# Altium PCB bt-bezel-braille4-kailh.PcbDoc
Units mm, origin at the board's own origin, x right, y up, seen from the top; angles counter-clockwise.
Board outline 65.7 x 134.7 mm, 2 copper layers (Top Layer, Bottom Layer), stack 1.571 mm thick; 39 components, 22 nets, 313 pads, 28 vias.
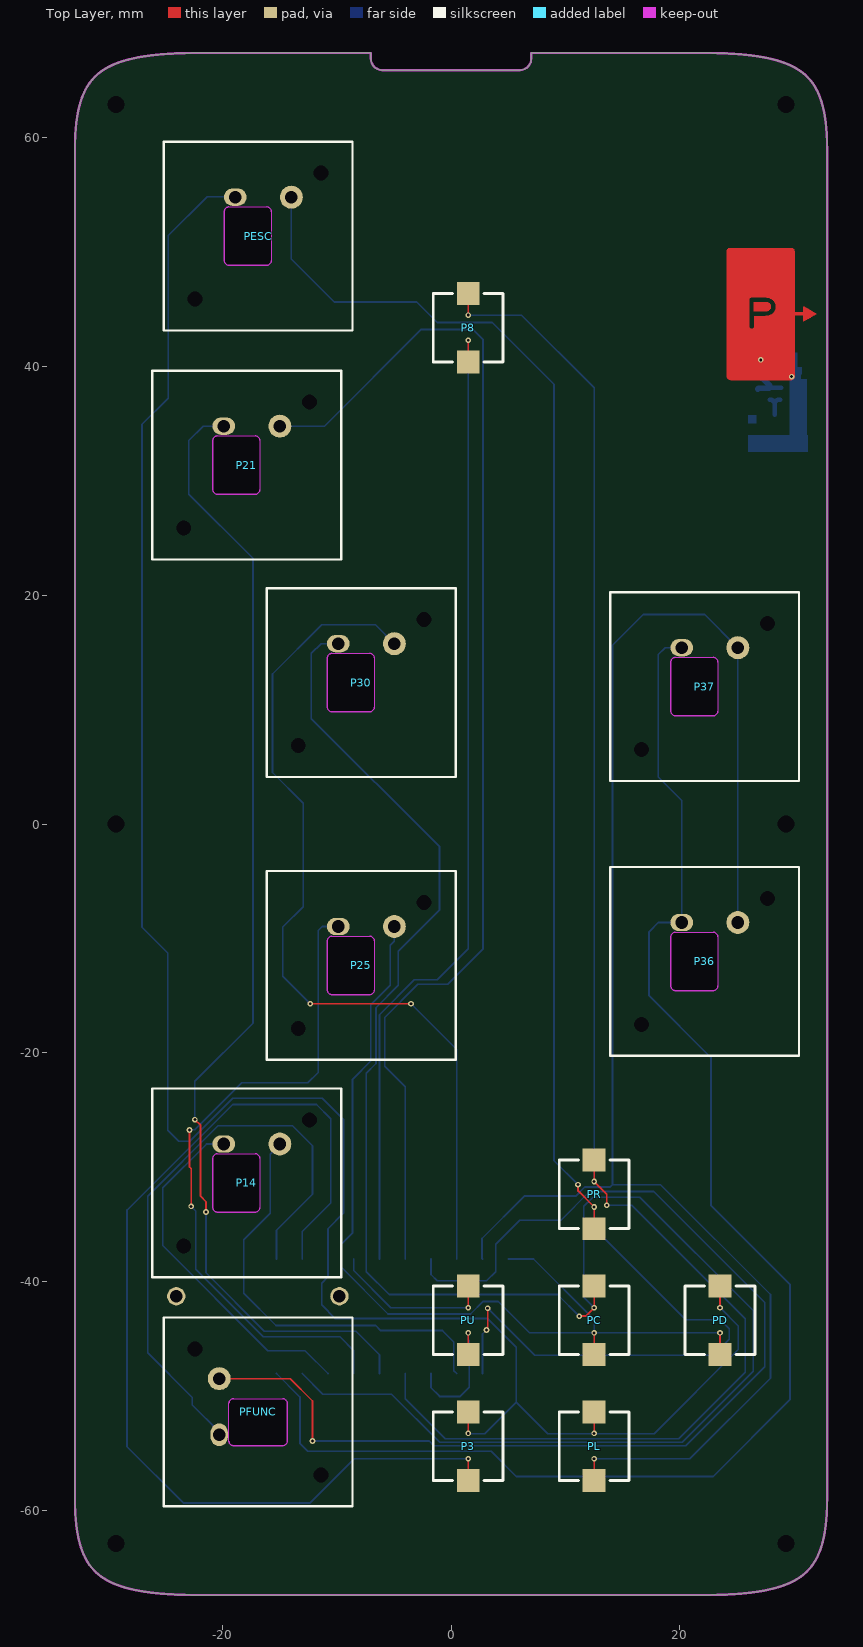
[diagram p0: Top Layer view]
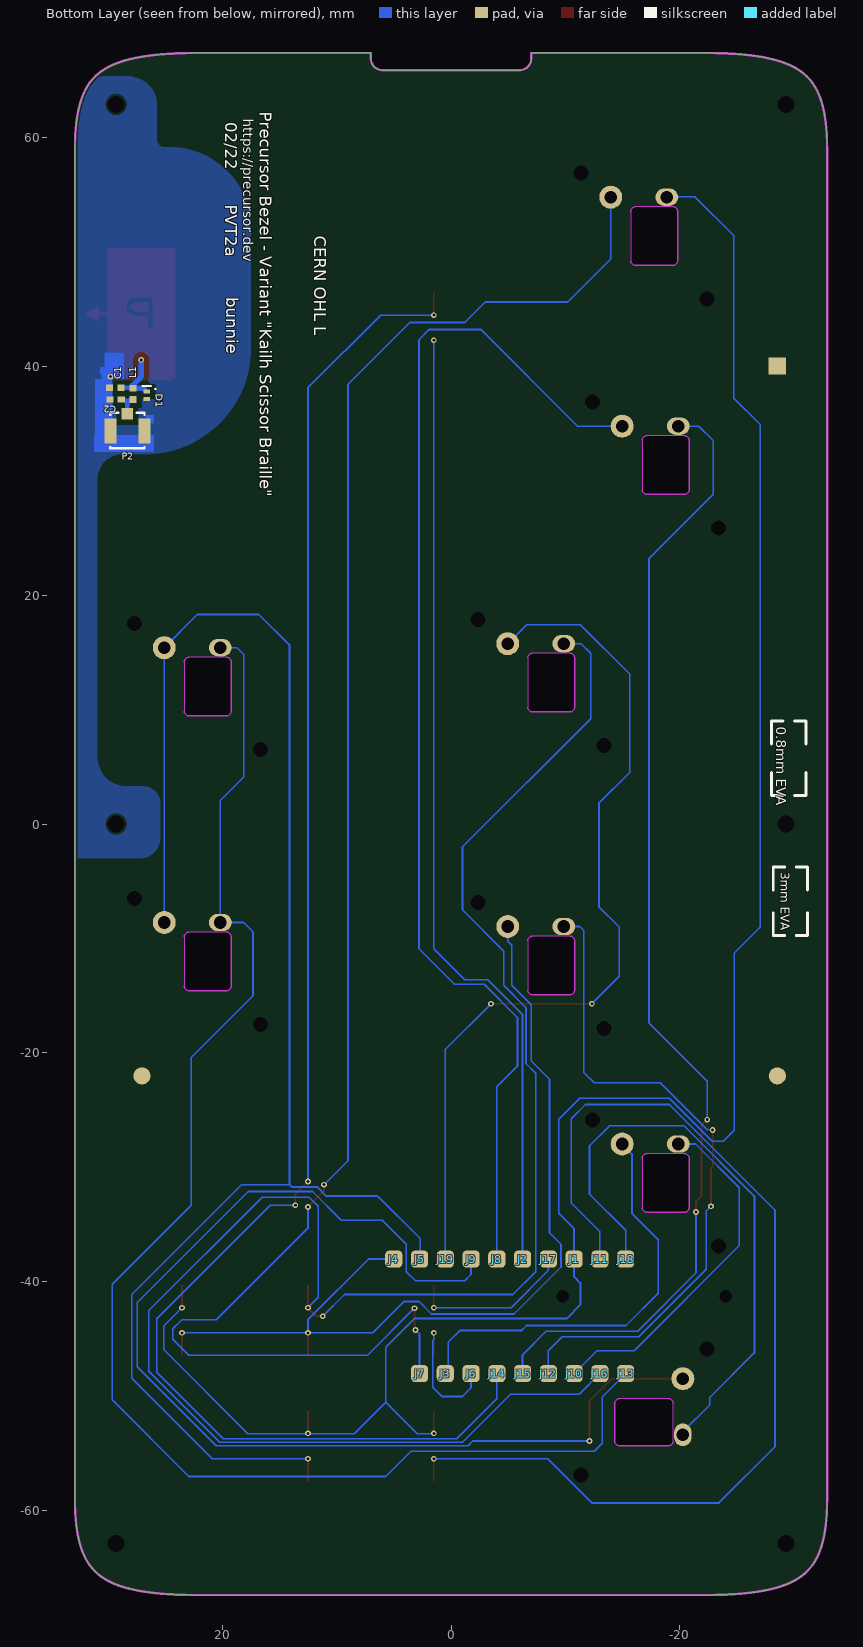
[diagram p1: Bottom Layer view, seen from below]
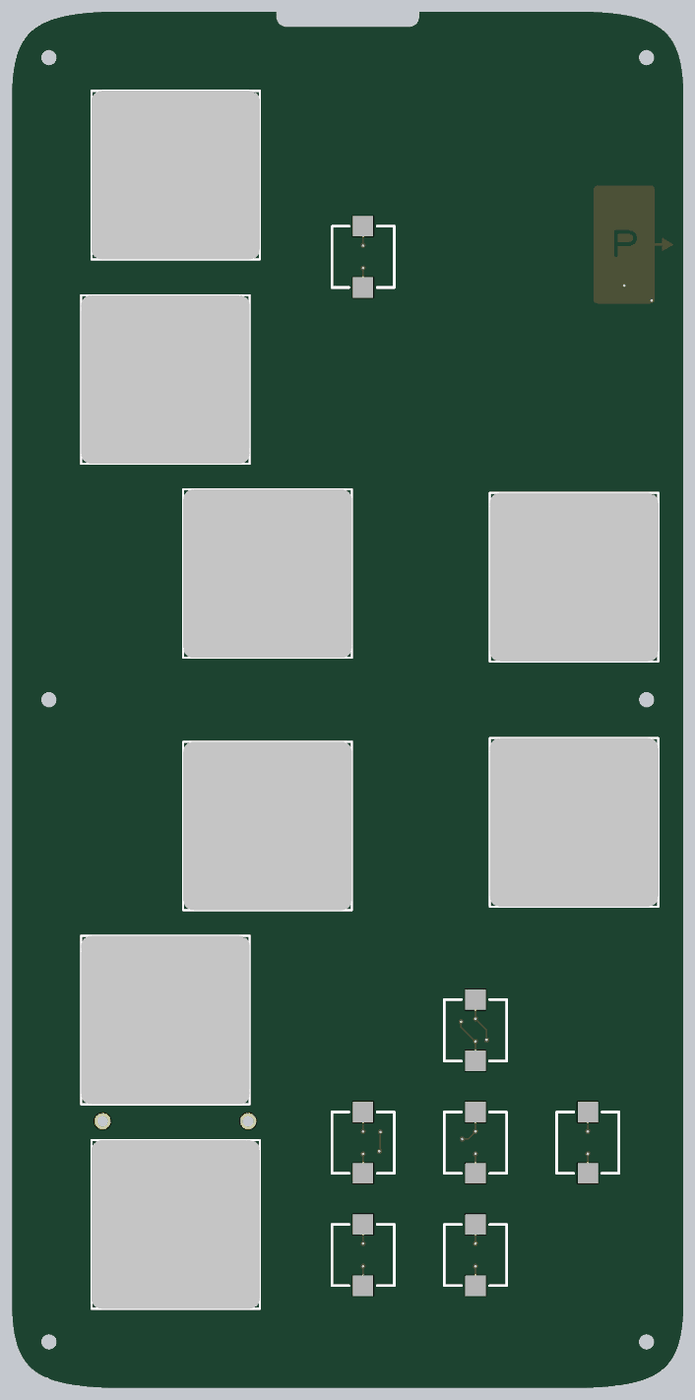
[diagram p2: 3D render of the assembled board from above, using the file's embedded part models]

## Layer stack, top to bottom
Top Layer: signal copper 0.0356
Light blocking FR-4: dielectric 1.5, FR-4, Dk 4.8
Bottom Layer: signal copper 0.0356
Bottom Solder: solder mask 0.0102, Solder Resist, Dk 3.5

## Board outline
1486 vertices, not listed, extent -32.85,-67.35 32.85,67.35
cut-out: 19.2,14.15 cw(c19.6,14.15) 19.6,14.55 22.9,14.55 cw(c22.9,14.15) 23.3,14.15 23.3,9.85 cw(c22.9,9.85) 22.9,9.45 19.6,9.45 cw(c19.6,9.85) 19.2,9.85
cut-out: 19.2,-9.85 cw(c19.6,-9.85) 19.6,-9.45 22.9,-9.45 cw(c22.9,-9.85) 23.3,-9.85 23.3,-14.15 cw(c22.9,-14.15) 22.9,-14.55 19.6,-14.55 cw(c19.6,-14.15) 19.2,-14.15
cut-out: -19.4,-50.6 cw(c-19,-50.6) -19,-50.2 -14.7,-50.2 cw(c-14.7,-50.6) -14.3,-50.6 -14.3,-53.9 cw(c-14.7,-53.9) -14.7,-54.3 -19,-54.3 cw(c-19,-53.9) -19.4,-53.9
cut-out: -20.8,-29.2 cw(c-20.4,-29.2) -20.4,-28.8 -17.1,-28.8 cw(c-17.1,-29.2) -16.7,-29.2 -16.7,-33.5 cw(c-17.1,-33.5) -17.1,-33.9 -20.4,-33.9 cw(c-20.4,-33.5) -20.8,-33.5 -20.8,-29.2
cut-out: -10.8,-10.2 cw(c-10.4,-10.2) -10.4,-9.8 -7.1,-9.8 cw(c-7.1,-10.2) -6.7,-10.2 -6.7,-14.5 cw(c-7.1,-14.5) -7.1,-14.9 -10.4,-14.9 cw(c-10.4,-14.5) -10.8,-14.5 -10.8,-10.2
cut-out: -10.8,14.5 cw(c-10.4,14.5) -10.4,14.9 -7.1,14.9 cw(c-7.1,14.5) -6.7,14.5 -6.7,10.2 cw(c-7.1,10.2) -7.1,9.8 -10.4,9.8 cw(c-10.4,10.2) -10.8,10.2 -10.8,14.5
cut-out: -19.8,53.5 cw(c-19.4,53.5) -19.4,53.9 -16.1,53.9 cw(c-16.1,53.5) -15.7,53.5 -15.7,49.2 cw(c-16.1,49.2) -16.1,48.8 -19.4,48.8 cw(c-19.4,49.2) -19.8,49.2 -19.8,53.5
cut-out: -20.8,33.5 cw(c-20.4,33.5) -20.4,33.9 -17.1,33.9 cw(c-17.1,33.5) -16.7,33.5 -16.7,29.2 cw(c-17.1,29.2) -17.1,28.8 -20.4,28.8 cw(c-20.4,29.2) -20.8,29.2 -20.8,33.5

## Design rules (kind name [scope] priority, off if disabled: settings)
Clearance Clearance_1 [InNetClass('RF') vs InNet('GND')] p1: gap=0.45 ignorepadtopadclearanceinfootprint=FALSE except(0: Arc-Hole Track-Hole SMDPad-Hole THPad-Hole Via-Hole Fill-Hole Poly-Hole Region-Hole Text-Hole)
Clearance [All] p2: gap=0.15 ignorepadtopadclearanceinfootprint=FALSE except(0: Arc-Hole Track-Hole SMDPad-Hole THPad-Hole Via-Hole Fill-Hole Poly-Hole Region-Hole Text-Hole)
ComponentClearance [All] p1 off: gap=0.254 collisioncheckmode=3 verticalgap=0.254 showdistances=FALSE
DiffPairsRouting [All] p1: maxlimit=0.254 minlimit=0.254 mostfreqgap=0.254 toplayer_minwidth=0.381 toplayer_maxwidth=0.381 toplayer_prefwidth=0.381 bottomlayer_minwidth=0.381 bottomlayer_maxwidth=0.381 bottomlayer_prefwidth=0.381 substack1={AFAED34E-20D2-479B-AD29-5B40F5E3A132} toplayer_{afaed34e-20d2-479b-ad29-5b40f5e3a132}_minwidth=0.381 toplayer_{afaed34e-20d2-479b-ad29-5b40f5e3a132}_maxwidth=0.381 toplayer_{afaed34e-20d2-479b-ad29-5b40f5e3a132}_prefwidth=0.381 bottomlayer_{afaed34e-20d2-479b-ad29-5b40f5e3a132}_minwidth=0.381 bottomlayer_{afaed34e-20d2-479b-ad29-5b40f5e3a132}_maxwidth=0.381 bottomlayer_{afaed34e-20d2-479b-ad29-5b40f5e3a132}_prefwidth=0.381 maxuncoupledlength=12.7
Height [All] p1 off: minheight=0 maxheight=25.4 prefheight=12.7
PolygonConnect [All] p1: connectstyle=Direct reliefconductorwidth=0.254 reliefentries=4 polygonreliefangle="90 Angle" airgapwidth=0.254
RoomDefinition kbd [InComponentClass('kbd')] p1 off: confinementstyle=ConfineIn formatcopy=TRUE lockcomponents=FALSE outline 34.001,-65.945 33.5,-65.945 33.5,-39.945 34.001,-39.945
RoutingVias [All] p1: holewidth=0.25 width=0.5 viastyle="Through Hole" minholewidth=0.25 minwidth=0.5 maxholewidth=0.5 maxwidth=1
SolderMaskExpansion [All] p1: expansion=0.102 istentingtop=FALSE
Width [All] p1: maxlimit=5 minlimit=0.15 preferedwidth=0.15 substack1={AFAED34E-20D2-479B-AD29-5B40F5E3A132} minimp=50.000000 maximp=50.000000 favimp=50.000000
27 further rules are at their usual default settings.

## Classes and differential pairs
net class RF: ANT1 FEED1

## Components (designator, comment, footprint, x,y, rotation, side; value= is the part's Value field where it differs from the comment)
C1 "3.9pF, NP0" B_CAP0402 29.335,38.111 r0 bottom
C2 "3.3pF, NP0" B_CAP0402 29.3,37.075 r0 bottom
D1 "TPD1E01B04DPYT" TI_PX1SON-N2 26.575,37.45 r270 bottom
J1 "solder pad (DNP)" TP_1.5x1.5_SMT -10.75,-38 r180 bottom
J2 "solder pad (DNP)" TP_1.5x1.5_SMT -6.25,-38 r180 bottom
J3 "solder pad (DNP)" TP_1.5x1.5_SMT 0.5,-48 r180 bottom
J4 "solder pad (DNP)" TP_1.5x1.5_SMT 5,-38 r180 bottom
J5 "solder pad (DNP)" TP_1.5x1.5_SMT 2.75,-38 r180 bottom
J6 "solder pad (DNP)" TP_1.5x1.5_SMT -1.75,-48 r180 bottom
J7 "solder pad (DNP)" TP_1.5x1.5_SMT 2.75,-48 r180 bottom
J8 "solder pad (DNP)" TP_1.5x1.5_SMT -4,-38 r180 bottom
J9 "solder pad (DNP)" TP_1.5x1.5_SMT -1.75,-38 r180 bottom
J10 "solder pad (DNP)" TP_1.5x1.5_SMT -10.75,-48 r90 bottom
J11 "solder pad (DNP)" TP_1.5x1.5_SMT -13,-38 r180 bottom
J12 "solder pad (DNP)" TP_1.5x1.5_SMT -8.5,-48 r90 bottom
J13 "solder pad (DNP)" TP_1.5x1.5_SMT -15.25,-48 r90 bottom
J14 "solder pad (DNP)" TP_1.5x1.5_SMT -4,-48 r90 bottom
J15 "solder pad (DNP)" TP_1.5x1.5_SMT -6.25,-48 r90 bottom
J16 "solder pad (DNP)" TP_1.5x1.5_SMT -13,-48 r90 bottom
J17 "solder pad (DNP)" TP_1.5x1.5_SMT -8.5,-38 r90 bottom
J18 "solder pad (DNP)" TP_1.5x1.5_SMT -15.25,-38 r90 bottom
J19 "solder pad (DNP)" TP_1.5x1.5_SMT 0.5,-38 r90 bottom
L1 "1.0nH" B_IND0402 27.775,37.575 r270 bottom
P2 "U.FL-R-SMT-1(10)" HRS_U.FL 28.266,34.316 r0 bottom
P3 "6mm square tact" PANASONIC_EVPAS 1.501,-54.35 r90 top
P8 "6mm square tact" PANASONIC_EVPAS 1.501,43.35 r90 top
P14 "Kailh Scissor" KAILH_CPG142501D03 -17.85,-31.35 r0 top
P21 "Kailh Scissor" KAILH_CPG142501D03 -17.85,31.35 r0 top
P25 "Kailh Scissor" KAILH_CPG142501D03 -7.85,-12.35 r0 top
P30 "Kailh Scissor" KAILH_CPG142501D03 -7.85,12.35 r0 top
P36 "Kailh Scissor" KAILH_CPG142501D03 22.152,-12 r0 top
P37 "Kailh Scissor" KAILH_CPG142501D03 22.152,12 r0 top
PC "6mm square tact" PANASONIC_EVPAS 12.501,-43.35 r90 top
PD "6mm square tact" PANASONIC_EVPAS 23.501,-43.35 r90 top
PESC "Kailh Scissor" KAILH_CPG142501D03 -16.847,51.35 r0 top
PFUNC "Kailh Scissor" KAILH_CPG142501D03 -16.847,-51.35 r90 top
PL "6mm square tact" PANASONIC_EVPAS 12.501,-54.35 r90 top
PR "6mm square tact" PANASONIC_EVPAS 12.501,-32.35 r90 top
PU "6mm square tact" PANASONIC_EVPAS 1.501,-43.35 r90 top

## Footprints (in the part's own frame and the unit in brackets; to place one, negate y for a bottom-side part, rotate by r counter-clockwise, add the part's x,y. Pads: shape width x height; smd on the part's side, far side on the other; paste and mask are expansions set on the pad)
B_CAP0402 [mm] "Capacitor 0402"
  rect 0.63x0.55 smd mask+0.07: 1(-0.5,0) 2(0.5,0)
  body extent -0.53,-0.27 0.53,0.28, height 0.4
B_IND0402 [mm] "Inductor 0402"
  rect 0.58x0.64 smd: 1(-0.49,0) 2(0.49,0)
  body extent -0.55,-0.3 0.55,0.3, height 0.6
HRS_U.FL [mm] "6 GHz U.FL connector (ISM band antennas)"
  rect 1.05x2.2 smd: GND(-1.475,0) GND(1.475,0)
  rect 1x1 smd: SIG(0,-1.5)
  silkscreen extent -1.5,-1.6 1.5,1.5, body extent -1.5,-1.6 1.5,1.5, height 1.24
KAILH_CPG142501D03 [mm] "Low profile scissor keyboard switch"
  round 1 hole 1.3 unplated: 0(-5.5,-5.5) 0(5.5,5.5)
  round 2 hole 1.1: 1(2.9,3.4)
  oval 2x1.5 hole 1.1: 2(-2,3.4)
  Keep-Out Layer lines w0.1: -2.95,-2.15 ccw(c-2.55,-2.15) -2.55,-2.55 0.75,-2.55 ccw(c0.75,-2.15) 1.15,-2.15 1.15,2.15 ccw(c0.75,2.15) 0.75,2.55 -2.55,2.55 ccw(c-2.55,2.15) -2.95,2.15 -2.95,-2.15
  silkscreen extent -8.25,-8.25 8.25,8.25, body extent -8.25,-8.25 8.25,8.25, height 5.27
PANASONIC_EVPAS [mm] "Tactile switch EVPAS series"
  rect 2x2 smd: 1(-3,0) 2(3,0)
  silkscreen extent -3,-3.05 3,3.05, body extent -3,-3.05 3,3.05, height 5
TI_PX1SON-N2 [mm] "TI 0402 SON diode footprint"
  rect 0.35x0.6 smd mask+0.05: 1(0.325,0) 2(-0.325,0)
  silkscreen extent -0.8,-0.34 -0.5,0.8, body extent -0.55,-0.35 0.55,0.35, height 0.45
TP_1.5x1.5_SMT [mm] "Test point 1.5x1.5mm SMT"
  rrect50% 1.5x1.5 smd mask+0.07: 1(0,0)

## Part data
C1: library part "Cap Semi", "Capacitor (Semiconductor SIM Model)", MPN=CL05C3R9CB5NNNC, MYPN=C-3p9-50-NP0-0402, VENDOR=Samsung
C2: library part "Cap Semi", "Capacitor (Semiconductor SIM Model)", MPN=GRM1555C1H3R3CA01D, MYPN=C-3p3-50-NP0-0402, VENDOR=Murata
D1: library part "D Zener", "CPDUR24V", LatestRevisionDate=17-Jul-2002, LatestRevisionNote="Re-released for DXP Platform.", MPN=TPD1E01B04DPYT, MYPN=D-TPD1E01B04DPYT, PackageDescription="Diode, Thru-Hole; 2 Leads; 0.7 in Pin Spacing", PackageReference=DIODE-0.7, Published=8-Jun-2000, Publisher="Altium Limited", VENDOR=TI
J1 J2 J3 J4 J5 J6 J7 J8 J9 J10 J11 J12 J13 J14 J15 J16 J17 J18 J19: library part CON1, "Connector", MPN=DNP, MYPN=J-TP-PWRTAP-0603, VENDOR=DNP
L1: library part Inductor, "Inductor", MPN=LQG15HS1N0S02D, Code_IEC=1005, Code_JEITA=0402, LatestRevisionDate=29-May-2009, LatestRevisionNote="IPC-7351 Footprint Added.", MYPN=L-1p0NH-0402, PackageDescription="Chip Inductor", PackageReference=0402-A, Published=8-Jun-2000, Publisher="Altium Limited", VENDOR=Murata
P2: library part BNC, "BNC Elbow Connector", MPN=P1163-0140R, LatestRevisionDate=17-Jul-2002, LatestRevisionNote="Re-released for DXP Platform.", MYPN=J-U.FL-SMT, Publisher="Altium Limited", VENDOR=Kaweei
P3 P8 PC PD PL PR PU: library part "Header 2", "Header, 2-Pin", MPN=EVP-ASAC1A, LatestRevisionDate=17-Jul-2002, LatestRevisionNote="Re-released for DXP Platform.", MYPN=SW-EVQ-P6DB35, Publisher="Altium Limited", VENDOR=Panasonic
P14 P21 P25 P30 P36 P37 PESC PFUNC: library part "Header 2", "Header, 2-Pin", MPN=CPG142501D03, LatestRevisionDate=17-Jul-2002, LatestRevisionNote="Re-released for DXP Platform.", MYPN=SW-EVQ-P6DB35, Publisher="Altium Limited", VENDOR=Kailh

## Free pads (board coordinates)
  round 1 hole 1.5 unplated mask+0.07: 0(-29.25,-62.85) 0(-29.25,0) 0(-29.25,62.85) 0(29.25,-62.85) 0(29.25,0) 0(29.25,62.85)
  rect 1.5x1.5 smd far side mask+1.5: 0(-28.5,40)
  round 1.6 / inner round 2 / far side round 0 hole 1.1: 0(-24,-41.25) 0(-9.75,-41.25)
  rect 0.051x0.864 on Bottom Overlay: 1(5.999,55.058) 1(7.066,57.141) 1(7.066,52.975) 1(11.994,52.975) 1(11.994,57.141)
  rect 0.051x0.965 on Bottom Overlay: 1(6.05,55.058) 1(6.101,55.058) 1(6.152,55.058) 1(7.117,52.975) 1(7.117,57.141)
  rect 0.051x1.016 on Bottom Overlay: 1(6.203,55.033) 1(11.943,53.001) 1(11.943,57.115)
  rect 0.051x1.067 on Bottom Overlay: 1(6.253,55.058) 1(6.304,55.058) 1(6.355,55.058) 1(6.406,55.058) 1(6.457,55.058)
  rect 0.051x1.118 on Bottom Overlay: 1(6.507,55.033) 1(7.168,53.001) 1(7.168,57.115) 1(11.892,53.001) 1(11.892,57.115)
  rect 0.051x1.168 on Bottom Overlay: 1(6.558,55.058) 1(6.609,55.058) 1(6.66,55.058) 1(6.711,55.058)
  rect 0.051x0.102 on Bottom Overlay: 1(6.761,52.899) 1(6.761,57.217) 1(11.994,56.15) 1(11.994,53.966)
  rect 0.051x1.219 on Bottom Overlay: 1(6.761,55.033) 1(7.219,57.115) 1(7.219,53.001)
  rect 0.051x0.254 on Bottom Overlay: 1(6.812,52.924) 1(6.812,57.192) 1(11.943,53.94) 1(11.943,56.176) 1(12.248,52.924) 1(12.248,57.192)
  rect 0.051x1.27 on Bottom Overlay: 1(6.812,55.058) 1(6.863,55.058) 1(6.914,55.058) 1(6.965,55.058)
  rect 0.051x0.356 on Bottom Overlay: 1(6.863,52.924) 1(6.863,57.192) 1(11.892,56.226) 1(11.892,53.89) 1(12.197,52.924)
  rect 0.051x0.457 on Bottom Overlay: 1(6.914,52.924)
  rect 0.051x0.508 on Bottom Overlay: 1(6.914,57.166) 1(12.146,52.95) 1(12.146,57.166)
  rect 0.051x0.61 on Bottom Overlay: 1(6.965,52.95) 1(6.965,57.166) 1(12.095,52.95)
  rect 0.051x1.473 on Bottom Overlay: 1(7.015,55.058)
  rect 0.051x0.762 on Bottom Overlay: 1(7.015,57.141) 1(12.045,52.975) 1(12.045,57.141)
  rect 0.051x0.711 on Bottom Overlay: 1(7.015,52.95)
  rect 0.051x1.727 on Bottom Overlay: 1(7.066,55.033) 1(10.876,56.506) 1(10.876,53.61) 1(10.927,53.61) 1(10.927,56.506) 1(10.978,56.506) 1(11.029,53.559) 1(11.029,56.557) 1(11.13,56.607) 1(11.13,53.509) 1(11.841,56.861)
  rect 0.051x1.981 on Bottom Overlay: 1(7.117,55.058) 1(8.641,56.531) 1(8.641,53.585) 1(10.419,53.534) 1(10.419,56.582)
  rect 0.051x2.184 on Bottom Overlay: 1(7.168,55.058)
  rect 0.051x2.489 on Bottom Overlay: 1(7.219,55.058) 1(9.505,52.772) 1(9.555,52.772) 1(9.606,52.772)
  rect 0.051x5.436 on Bottom Overlay: 1(7.269,55.058) 1(7.523,55.058)
  rect 0.051x5.537 on Bottom Overlay: 1(7.32,55.058) 1(7.422,55.058) 1(7.473,55.058)
  rect 0.051x5.639 on Bottom Overlay: 1(7.371,55.058)
  rect 0.051x5.334 on Bottom Overlay: 1(7.574,55.058) 1(7.625,55.058)
  rect 0.051x5.232 on Bottom Overlay: 1(7.676,55.058)
  rect 0.051x5.131 on Bottom Overlay: 1(7.727,55.058)
  rect 0.051x5.08 on Bottom Overlay: 1(7.777,55.033)
  rect 0.051x5.029 on Bottom Overlay: 1(7.828,55.058)
  rect 0.051x4.928 on Bottom Overlay: 1(7.879,55.058)
  rect 0.051x4.877 on Bottom Overlay: 1(7.93,55.033)
  rect 0.051x4.826 on Bottom Overlay: 1(7.981,55.058) 1(8.438,55.058) 1(8.489,55.058)
  rect 0.051x4.724 on Bottom Overlay: 1(8.031,55.058) 1(8.336,55.058) 1(8.387,55.058)
  rect 0.051x4.674 on Bottom Overlay: 1(8.082,55.033)
  rect 0.051x4.623 on Bottom Overlay: 1(8.133,55.058) 1(8.184,55.058) 1(8.235,55.058) 1(8.285,55.058)
  rect 0.051x2.337 on Bottom Overlay: 1(8.539,53.763) 1(10.063,53.001) 1(10.063,57.115)
  rect 0.051x2.286 on Bottom Overlay: 1(8.539,56.328) 1(8.997,57.039) 1(8.997,53.026)
  rect 0.051x2.134 on Bottom Overlay: 1(8.59,53.661) 1(8.59,56.455) 1(10.114,53.153) 1(10.114,56.963)
  rect 0.051x1.93 on Bottom Overlay: 1(8.692,56.607) 1(8.692,53.509) 1(10.317,56.658) 1(10.368,56.607) 1(10.368,53.509) 1(10.622,53.61) 1(10.622,56.506) 1(10.673,56.506) 1(10.673,53.61) 1(11.689,53.204) 1(11.689,56.912)
  rect 0.051x1.88 on Bottom Overlay: 1(8.743,53.483) 1(8.743,56.633) 1(8.793,53.432) 1(10.165,53.331) 1(10.165,56.785) 1(10.317,53.432) 1(10.724,53.585) 1(10.724,56.48) 1(11.435,53.331) 1(11.537,53.28) 1(11.537,56.836) 1(11.587,53.229) 1(11.587,56.836) 1(11.638,56.887) 1(11.638,53.229)
  rect 0.051x1.829 on Bottom Overlay: 1(8.793,56.658) 1(8.844,56.709) 1(8.844,53.407) 1(8.895,56.76) 1(8.895,53.356) 1(10.216,53.356) 1(10.216,56.709) 1(10.267,53.407) 1(10.267,56.709) 1(10.775,53.61) 1(10.775,56.506) 1(10.825,53.61) 1(10.825,56.506) 1(11.333,56.709) 1(11.384,53.356) 1(11.384,56.76) 1(11.435,56.76) 1(11.486,53.305) 1(11.486,56.811) 1(11.74,53.204) 1(11.74,56.912)
  rect 0.051x2.032 on Bottom Overlay: 1(8.946,53.204) 1(8.946,56.912) 1(10.47,53.559) 1(10.47,56.506) 1(10.521,56.506) 1(10.521,53.61) 1(10.571,53.61) 1(10.571,56.506)
  rect 0.051x2.54 on Bottom Overlay: 1(9.047,52.899) 1(9.047,57.217) 1(9.251,52.797) 1(9.251,57.319) 1(9.301,52.797) 1(9.301,57.319) 1(9.352,52.797) 1(9.352,57.319) 1(9.403,52.797) 1(9.403,57.319) 1(9.454,57.319) 1(9.454,52.797) 1(9.505,57.319) 1(9.555,57.319) 1(9.606,57.319) 1(9.657,57.319) 1(9.657,52.797) 1(9.708,52.797) 1(9.708,57.319) 1(9.759,52.797) 1(9.759,57.319) 1(9.809,52.797) 1(9.809,57.319) 1(9.86,52.797)
  rect 0.051x2.591 on Bottom Overlay: 1(9.098,52.823) 1(9.149,52.823) 1(9.149,57.293) 1(9.2,52.823) 1(9.2,57.293) 1(9.86,57.293) 1(9.911,52.823) 1(9.911,57.293) 1(9.962,52.823) 1(9.962,57.293) 1(10.013,52.874) 1(10.013,57.242)
  rect 0.051x2.642 on Bottom Overlay: 1(9.098,57.268)
  rect 0.051x1.676 on Bottom Overlay: 1(10.978,53.585) 1(11.841,53.229)
  rect 0.051x1.778 on Bottom Overlay: 1(11.079,53.534) 1(11.079,56.582) 1(11.181,53.483) 1(11.181,56.633) 1(11.232,56.684) 1(11.232,53.432) 1(11.283,56.684) 1(11.283,53.432) 1(11.333,53.382) 1(11.791,56.887) 1(11.791,53.229)
  rect 0.051x0.66 on Bottom Overlay: 1(12.095,57.141)
  rect 0.051x0.406 on Bottom Overlay: 1(12.197,57.166)
  rect 0.051x0.152 on Bottom Overlay: 1(12.299,52.924) 1(12.299,57.192)
  round 1.5 smd far side mask+1.5: 2(27,-22) 3(-28.5,-22)

## Via types
v1: diameter 0.5, hole 0.25, Top Layer to Bottom Layer, tented both sides, 28 vias

## Nets (pads, with @x,y where several pads share a name; then routed paths per layer and width w, separated by ;. In a path a pad name is that pad's centre, name@x,y a point inside that pad or via, vN(x,y) a via of type N, cw(c..) or ccw(c..) an arc to the next point about the centre after c; other vN are vias at no path point)
ANT1: C1.1 D1.2 L1.1 | length 4.6
  Bottom Layer w0.4: L1.1@27.833,38.292 27.85,38.275 L1.1@27.86,38.275 ; L1.1@27.86,38.075 27.85,38.075 cw(c27.886,38.075) 27.886,38.111 C1.1
  Bottom Layer w0.5: 26.8,38 26.865,38.065 L1.1 ; v1(27.057,40.539) 27.057,39.275 ccw(c27.557,39.275) 27.204,38.921 L1.1@27.833,38.292
  other v1: 29.75,39.075
FEED1: C2.1 L1.2 P2.SIG | length 2.3
  Bottom Layer w0.4: L1.2@27.85,37.075 cw(c27.85,36.659) 28.266,36.659 ; P2.SIG@28.266,35.759 P2.SIG 28.266,36.659 ; C2.1@28.76,37.075 28.682,37.075 ccw(c28.682,36.659) 28.266,36.659
GND: C1.2 C2.2 D1.1 P2.GND
KEY0: J10.1 P14.2 | length 31
  Bottom Layer w0.15: P14.2 -21.35,-27.95 -25.188,-31.788 -25.188,-36.812 -16,-46 -12.75,-46 J10.1
KEY1: J12.1 P25.2 | length 58.8
  Top Layer w0.15: v1(-22.85,-26.725) -22.85,-29.954 -22.7,-30.104 v1(-22.7,-33.4)
  Bottom Layer w0.15: v1(-22.85,-26.725) -22.825,-26.7 -22.375,-26.7 -18.275,-22.6 -12.5,-22.6 -11.6,-21.7 -11.6,-9.3 -11.25,-8.95 P25.2 ; v1(-22.7,-33.4) -22.3,-33.8 -22.3,-38.9 -16.4,-44.8 -9.7,-44.8 -8.5,-46 J12.1
KEY2: J13.1 P36.2 P37.2 | length 129.5
  Bottom Layer w0.15: J13.1 -13.2,-50.05 -13.2,-54.1 -12.5,-54.8 3.5,-54.8 5.7,-57 22.9,-57 29.6,-50.3 29.6,-40.2 22.7,-33.3 22.7,-20.4 17.3,-15 17.3,-9.4 18.1,-8.6 P36.2 20.152,2.048 18.1,4.1 18.1,14.8 18.7,15.4 P37.2
KEY3: J14.1 P8.2 PR.2 | length 145.9
  Top Layer w0.15: v1(1.502,44.45) P8.2 ; v1@12.501,-31.249 12.502,-31.25 13.6,-32.348 v1(13.6,-33.3) ; PR.2 12.502,-29.351 v1(12.502,-31.225)
  Bottom Layer w0.15: J14.1 -4,-50.2 -0.5,-53.7 19.9,-53.7 25.7,-47.9 25.7,-43.2 15.8,-33.3 v1(13.6,-33.3) ; v1(1.502,44.45) 6.15,44.45 12.502,38.098 v1(12.502,-31.225)
KEY4: J15.1 P21.2 | length 100.9
  Top Layer w0.15: v1(-22.375,-25.825) -21.875,-26.325 -21.875,-32.525 -21.4,-33 v1(-21.4,-33.9)
  Bottom Layer w0.15: v1(-22.375,-25.825) -22.375,-22.475 -17.3,-17.4 -17.3,23.2 -22.9,28.8 -22.9,33.5 -21.65,34.75 P21.2 ; v1(-21.4,-33.9) -21.4,-39.2 -16.3,-44.3 -8.3,-44.3 -6.25,-46.35 J15.1
KEY5: J16.1 P30.2 PC.2 | length 165.9
  Top Layer w0.15: v1(11.2,-43) 11.218,-42.982 11.77,-42.982 v1(12.502,-42.25) 12.501,-42.249 PC.2
  Bottom Layer w0.15: J16.1 -11.2,-49.8 -5.2,-49.8 -1,-54 20.2,-54 26.4,-47.8 26.4,-42.5 16.5,-32.6 12.4,-32.6 11.6,-33.4 11.6,-41.348 v1(12.502,-42.25) ; P30.2 -11.35,15.75 -12.2,14.9 -12.2,9.2 -1,-2 -1,-7.5 -4.6,-11.1 -4.6,-14.1 -6.55,-16.05 -6.55,-20.925 -7.4,-21.775 -7.4,-39.1 -5.4,-41.1 9.3,-41.1 v1(11.2,-43)
KEY6: J17.1 PU.2 | length 14.2
  Top Layer w0.15: PU.2 v1(1.502,-42.25) v1(1.502,-42.25)
  Bottom Layer w0.15: J17.1 -8.5,-39 -5.25,-42.25 v1(1.502,-42.25)
KEY7: J18.1 PFUNC.2 | length 52.3
  Bottom Layer w0.15: PFUNC.2 -20.248,-53.1 -22.6,-50.748 -22.6,-50.1 -26.5,-46.2 -26.5,-32.5 -20.35,-26.35 -13.85,-26.35 -12.1,-28.1 -12.1,-32.35 -15.25,-35.5 J18.1
KEY8: J1.1 P3.2 PD.2 PESC.2 PL.2 | length 184.6
  Top Layer w0.15: P3.2 P3.2 v1(1.502,-53.225) ; PL.2 12.502,-51.351 v1(12.502,-53.225) ; PD.2 v1(23.502,-42.25) v1(23.502,-42.25)
  Bottom Layer w0.15: PESC.2 -18.898,54.8 -21.3,54.8 -24.7,51.4 -24.7,37.2 -27,34.9 -27,-9 -24.738,-11.262 -24.738,-26.737 -23.775,-27.7 -22.825,-27.7 -19.075,-23.95 -11.25,-23.95 -9.4,-25.8 -9.4,-34 -10.75,-35.35 J1.1 -10.75,-39.55 -11.3,-40.1 -11.3,-42 -10.1,-43.2 3.2,-43.2 5.7,-45.7 5.7,-50.5 ; v1(1.502,-53.225) 1.527,-53.25 2.95,-53.25 5.7,-50.5 ; v1@12.502,-53.25 17.75,-53.25 25.1,-45.9 25.1,-43.848 v1(23.502,-42.25) ; v1(12.502,-53.225) 12.477,-53.25 8.45,-53.25 5.7,-50.5
KEY9: J11.1 P3.1 | length 91.4
  Top Layer w0.15: P3.1 1.501,-55.451 v1(1.5,-55.45)
  Bottom Layer w0.15: J11.1 -13,-35.6 -10.5,-33.1 -10.5,-25.75 -11.75,-24.5 -19.075,-24.5 -28.3,-33.725 -28.3,-54.4 -23.4,-59.3 -12.3,-59.3 -8.45,-55.45 v1(1.5,-55.45)
KEY10: J3.1 P14.1 | length 37.3
  Bottom Layer w0.15: P14.1 -14.95,-27.982 -15.8,-28.832 -15.8,-34 -18.1,-36.3 -18.1,-40.983 -15.283,-43.8 -6.588,-43.8 -6.138,-44.25 -0.75,-44.25 0.25,-45.25 0.25,-47.75 J3.1
KEY11: J4.1 P25.1 PC.1 PD.1 | length 82.7
  Top Layer w0.15: v1(12.5,-44.45) 12.501,-44.451 PC.1 ; PD.1 23.501,-44.451 v1(23.5,-44.45)
  Bottom Layer w0.15: P25.1 -4.95,-10.25 -5.3,-10.6 -5.3,-14.1 -7,-15.8 -7,-20.696 -8.6,-22.296 -8.6,-35.7 -9.6,-36.7 -9.6,-38.7 -5.5,-42.8 1.7,-42.8 2.8,-41.7 4.1,-41.7 6.85,-44.45 v1(12.5,-44.45) ; J4.1 7.2,-38 12.5,-43.3 v1(12.5,-44.45) ; v1(23.5,-44.45) v1(12.5,-44.45)
KEY12: J5.1 P36.1 P37.1 PL.1 | length 144.8
  Top Layer w0.15: v1(12.5,-55.45) 12.501,-55.451 PL.1
  Bottom Layer w0.15: J5.1 2.7,-37.95 2.7,-36.2 6.4,-32.5 10.9,-32.5 11.7,-31.7 13.9,-31.7 14.1,-31.5 ; v1(12.5,-55.45) 20.85,-55.45 27.9,-48.4 27.9,-41.1 18.3,-31.5 14.1,-31.5 ; P36.1 P37.1 22.152,18.3 16.8,18.3 14.1,15.6 14.1,-31.5
KEY13: J6.1 PU.1 | length 11.9
  Top Layer w0.15: PU.1 1.501,-44.451 v1(1.5,-44.45)
  Bottom Layer w0.15: J6.1 -1.75,-49.25 -1,-50 0.8,-50 1.6,-49.2 1.6,-45.122 1.5,-45.022 v1(1.5,-44.45)
KEY14: J9.1 PFUNC.1 | length 100
  Top Layer w0.15: PFUNC.1 -14.05,-48.45 -12.1,-50.4 v1(-12.1,-53.89)
  Bottom Layer w0.15: v1(-12.1,-53.89) -1.91,-53.89 -1.5,-54.3 20.5,-54.3 27.4,-47.4 27.4,-41.8 17.7,-32.1 12.1,-32.1 9.6,-34.6 6,-34.6 3.9,-36.7 3.9,-39.1 3.1,-39.9 -1.2,-39.9 -1.75,-39.35 J9.1
KEY15: J7.1 PESC.1 PR.1 | length 155.5
  Top Layer w0.15: v1(3.1,-44.2) 3.167,-44.133 3.167,-43.97 3.2,-43.937 v1(3.2,-42.3) ; v1(11.1,-31.5) 11.1,-32.05 v1(12.5,-33.45) v1(12.5,-33.45) PR.1
  Bottom Layer w0.15: PESC.1 -13.948,49.351 -10.196,45.6 -3,45.6 -1.2,43.8 3.6,43.8 9,38.4 9,-29.4 v1(11.1,-31.5) ; J7.1 2.75,-44.55 v1(3.1,-44.2) ; v1(3.2,-42.3) 7.3,-46.4 22.9,-46.4 24.3,-45 24.3,-44.1 23.5,-43.3 20.5,-43.3 12.5,-35.3 v1(12.5,-33.45)
KEY16: J19.1 P30.1 | length 77.5
  Top Layer w0.15: v1(-12.3,-15.7) v1(-3.5,-15.7)
  Bottom Layer w0.15: v1(-12.3,-15.7) -14.7,-13.3 -14.7,-9 -12.917,-7.217 -12.917,1.817 -15.6,4.5 -15.6,13.1 -11.3,17.4 -6.6,17.4 P30.1 ; v1(-3.5,-15.7) 0.5,-19.7 J19.1
KEY17: J8.1 P21.1 | length 107.8
  Bottom Layer w0.15: P21.1 -11.05,34.75 -2.6,43.2 1.9,43.2 2.8,42.3 2.8,-10.9 -0.3,-14 -2.9,-14 -5.8,-16.9 -5.8,-21.147 -4,-22.947 J8.1
KEY18: J2.1 P8.1 | length 86.5
  Top Layer w0.15: P8.1 1.501,42.249 v1(1.5,42.25)
  Bottom Layer w0.15: J2.1 -6.25,-16.65 -3.2,-13.6 -1.2,-13.6 1.5,-10.9 v1(1.5,42.25)
pads on no net: P14.0 P21.0 P25.0 P30.0 P36.0 P37.0 PESC.0 PFUNC.0

## Polygon pours and split planes (outlines as drawn)
GND on Bottom Layer "GND_L02_P004" (solid, remove dead copper, pour order 4): 35.8,65.3 28.2,65.3 ccw(c28.2,62.8) 25.7,62.8 25.7,59.8 cw(c25,59.8) 25,59.1 ccw(c24.549,52.05) 17.499,52.501 17.499,41.541 ccw(c26.74,41.541) 26.74,32.3 28.7,32.3 cw(c28.7,30.1) 30.9,30.1 30.9,5.84 cw(c28.36,5.84) 28.36,3.3 26.9,3.3 ccw(c26.9,1.8) 25.4,1.8 25.4,-1.2 ccw(c27.2,-1.2) 27.2,-3 34.1,-3 ccw(c34.1,-2.5) 34.6,-2.5

## Keep-outs
Keep-Out Layer:
  the board outline again, w0.2

## Other copper
Top Layer:
  region: 27.582,45.554 27.671,45.554 27.671,45.525 27.731,45.525 27.731,45.495 27.791,45.495 27.791,45.465 27.821,45.465 27.821,45.435 27.851,45.435 27.851,45.405 27.88,45.405 27.88,45.375 27.88,45.345 27.91,45.345 27.91,45.316 27.91,45.286 27.91,45.256 27.94,45.256 27.94,45.226 27.94,45.196 27.94,45.166 27.94,45.136 27.94,45.106 27.91,45.106 27.91,45.077 27.91,45.047 27.91,45.017 27.88,45.017 27.88,44.987 27.851,44.987 27.851,44.957 27.851,44.927 27.821,44.927 27.821,44.897 27.761,44.897 27.761,44.868 27.731,44.868 27.731,44.838 27.641,44.838 27.641,44.808 27.552,44.808 27.552,44.778 26.447,44.778 26.447,44.808 26.447,44.838 26.447,44.868 26.447,44.897 26.447,44.927 26.447,44.957 26.447,44.987 26.447,45.017 26.447,45.047 26.447,45.077 26.447,45.106 26.447,45.136 26.447,45.166 26.447,45.196 26.447,45.226 26.447,45.256 26.447,45.286 26.447,45.316 26.447,45.345 26.447,45.375 26.447,45.405 26.447,45.435 26.447,45.465 26.447,45.495 26.447,45.525 26.447,45.554 26.447,45.584 27.582,45.584
  region net ANT1: 916 vertices and 1 holes, not listed, extent 24.087,38.775 31.883,50.303
  region: -19.2,-2.9
  region: -19.2,-2.9
  region: -19.2,-2.9
  region: -14.708,-11.763
  region: -14.708,-11.763
  region: -14.708,-11.763
Bottom Layer:
  rectangle net GND: 30.2,39.275 30.65,39.925
  rectangle net GND: 25.95,34.975 26.7,35.725
  rectangle net GND: 25.925,32.475 31.175,33.975
  rectangle net GND: 28.55,38.875 30.25,41.175
  rectangle net GND: 29.585,32.481 31.085,38.881
  rectangle net GND: 29.65,38.175 30.55,39.475

## Silkscreen, mask and mechanical layers (free items; w line width, h text height)
Bottom Overlay:
  lines w0.25: -31.15,-7.75 -31.15,-9.75 -30.15,-9.75 ; -31.15,-5.75 -31.15,-3.75 -30.15,-3.75 ; -31,4.5 -31,2.5 -30,2.5 ; -31,7 -31,9 -30,9 ; -29.15,-9.75 -28.15,-9.75 -28.15,-7.75 ; -29.15,-3.75 -28.15,-3.75 -28.15,-5.75 ; -29,2.5 -28,2.5 -28,4.5 ; -29,9 -28,9 -28,7
  text "Precursor Bezel - Variant \"Kailh Scissor Braille\"" at 17.05,62.2 h1.8 r90
  text "https://precursor.dev" at 18.45,61.6 h1.5 r90
  text "02/22" at 20.05,61.3 h1.8 r90
  text "PVT2a" at 20.05,54.1 h1.8 r90
  text "CERN OHL L" at 12.3,51.4 h1.8 r90
  text "bunnie" at 20,46 h1.8 r90
  text "0.8mm EVA" at -28.095,8.475 h1.5 r90
  text "3mm EVA" at -28.55,-4.225 h1.3 r90
Bottom Solder:
  rectangle: 27.554,-2.75 32.9,2.75
  rectangle: 31.7,1.8 32.9,58.3
Mechanical 1:
  drawing of 1519 lines, arcs and shapes, not listed
Mechanical 2:
  circle w0.05: c-16.85,51.35 r0.025
  lines w0.1: -32.85,-59 -32.811,-60.34 ; -32.85,-59 -32.811,-60.34 ; -32.85,-59 -32.85,59 ; -32.85,59 -32.811,60.349 ; -32.85,59 -32.811,60.349 ; -32.811,-60.34 -32.674,-61.665 ; -32.811,-60.34 -32.674,-61.665 ; -32.811,60.349 -32.67,61.689 ; -32.811,60.349 -32.67,61.689 ; -32.674,-61.665 -32.393,-62.968 ; -32.674,-61.665 -32.393,-62.968 ; -32.67,61.689 -32.38,63.01 ; -32.67,61.689 -32.38,63.01 ; -32.393,-62.968 -32.038,-63.922 ; -32.393,-62.968 -32.038,-63.922 ; -32.38,63.01 -32.023,63.954 ; -32.38,63.01 -32.023,63.954 ; -32.038,-63.922 -31.522,-64.794 ; -32.038,-63.922 -31.522,-64.794 ; -32.023,63.954 -31.499,64.824 ; -32.023,63.954 -31.499,64.824 ; -31.522,-64.794 -30.819,-65.535 ; -31.522,-64.794 -30.819,-65.535 ; -31.499,64.824 -30.797,65.553 ; -31.499,64.824 -30.797,65.553 ; -30.819,-65.535 -29.975,-66.099 ; -30.819,-65.535 -29.975,-66.099 ; -30.797,65.553 -29.952,66.111 ; -30.797,65.553 -29.952,66.111 ; -29.975,-66.099 -28.461,-66.698 ; -29.975,-66.099 -28.461,-66.698 ; -29.952,66.111 -28.441,66.703 ; -29.952,66.111 -28.441,66.703 ; -28.461,-66.698 -26.871,-67.043 ; -28.461,-66.698 -26.871,-67.043 ; -28.441,66.703 -26.854,67.046 ; -28.441,66.703 -26.854,67.046 ; -26.871,-67.043 -25.253,-67.233 ; -26.871,-67.043 -25.253,-67.233 ; -26.854,67.046 -25.241,67.234 ; -26.854,67.046 -25.241,67.234 ; -25.253,-67.233 -23.629,-67.325 ; -25.253,-67.233 -23.629,-67.325 ; -25.241,67.234 -23.623,67.325 ; -25.241,67.234 -23.623,67.325 ; -23.629,-67.325 -22,-67.35 ; -23.629,-67.325 -22,-67.35 ; -23.623,67.325 -22,67.35 -23.623,67.325 ; -22,-67.35 22,-67.35 ; 22,-67.35 23.623,-67.325 ; 22,-67.35 23.623,-67.325 ; 23.623,-67.325 25.241,-67.234 ; 23.623,-67.325 25.241,-67.234 ; 23.629,67.325 22,67.35 23.629,67.325 ; 23.629,67.325 25.253,67.233 ; 23.629,67.325 25.253,67.233 ; 25.241,-67.234 26.854,-67.046 ; 25.241,-67.234 26.854,-67.046 ; 25.253,67.233 26.871,67.043 ; 25.253,67.233 26.871,67.043 ; 26.854,-67.046 28.441,-66.703 ; 26.854,-67.046 28.441,-66.703 ; 26.871,67.043 28.461,66.698 ; 26.871,67.043 28.461,66.698 ; 28.441,-66.703 29.952,-66.111 ; 28.441,-66.703 29.952,-66.111 ; 28.461,66.698 29.975,66.099 ; 28.461,66.698 29.975,66.099 ; 29.952,-66.111 30.797,-65.553 ; 29.952,-66.111 30.797,-65.553 ; 29.975,66.099 30.819,65.535 ; 29.975,66.099 30.819,65.535 ; 30.797,-65.553 31.499,-64.824 ; 30.797,-65.553 31.499,-64.824 ; 30.819,65.535 31.522,64.794 ; 30.819,65.535 31.522,64.794 ; 31.499,-64.824 32.023,-63.954 ; 31.499,-64.824 32.023,-63.954 ; 31.522,64.794 32.038,63.922 ; 31.522,64.794 32.038,63.922 ; 32.023,-63.954 32.38,-63.01 ; 32.023,-63.954 32.38,-63.01 ; 32.038,63.922 32.393,62.968 ; 32.038,63.922 32.393,62.968 ; 32.38,-63.01 32.67,-61.689 ; 32.38,-63.01 32.67,-61.689 ; 32.393,62.968 32.674,61.665 ; 32.393,62.968 32.674,61.665 ; 32.67,-61.689 32.811,-60.349 ; 32.67,-61.689 32.811,-60.349 ; 32.674,61.665 32.811,60.34 ; 32.674,61.665 32.811,60.34 ; 32.811,-60.349 32.85,-59 ; 32.811,-60.349 32.85,-59 ; 32.811,60.34 32.85,59 ; 32.811,60.34 32.85,59 ; 32.85,-59 32.85,59
  lines w0.2: -22,67.35 -7,67.35 -7,66.85 ccw(c-6,66.85) -6,65.85 6,65.85 ccw(c6,66.85) 7,66.85 7,67.35 22,67.35
Dimensions:
  drawing of 296 lines, arcs and shapes, not listed
  text "Profile of cross section line C-C, showing countersink hole" at -47,83.081 h1.5
  text "Note: 6x countersink hole 45 degree, see section C-C" at 41.6,72.781 h1.5
  text "Layer" at 50.288,57.096 h1.52
  text "Name" at 60.7,57.096 h1.52
  text "Material" at 91.679,57.096 h1.52
  text "Thickness" at 113.517,57.096 h1.52
  text "Constant" at 130.023,57.096 h1.52
  text "Board Layer Stack" at 144.497,57.096 h1.52
  text "Board Layer Stack" at 172.937,57.096 h1.52
  text "C" at -43.284,54.913 h3.5
  text "C" at 40.034,54.913 h3.5
  text "1" at 50.288,54.048 h1.52
  text "Top Layer" at 60.7,54.048 h1.52
  text "0.036mm" at 113.517,54.048 h1.52
  text "Light blocking FR-4" at 60.7,51 h1.52
  text "FR-4" at 91.679,51 h1.52
  text "1.500mm" at 113.517,51 h1.52
  text "4.8" at 130.023,51 h1.52
  text "2" at 50.288,47.952 h1.52
  text "Bottom Layer" at 60.7,47.952 h1.52
  text "0.036mm" at 113.517,47.952 h1.52
  text "Bottom Solder" at 60.7,44.904 h1.52
  text "Solder Resist" at 91.679,44.904 h1.52
  text "0.010mm" at 113.517,44.904 h1.52
  text "3.5" at 130.023,44.904 h1.52
  text "Bottom Overlay" at 60.7,41.856 h1.52
  text "Finish: immersion gold" at 50.8,35.2 h1.5
  text "Top side no solder mask or silkscreen" at 50.7,28.581 h1.5
  text "Bottom side clear soldermask, light gray silkscreen" at 51.1,23.581 h1.5
  text "4.1x5.1mm cutout, 8 places as specified on .GM2 layer" at 51.175,22.325 h1.5
Route Tool Path:
  drawing of 1518 lines, arcs and shapes, not listed
  text "KEY7" at -14.9,-36.35 h0.75 r90
  text "KEY9" at -12.65,-36.35 h0.75 r90
  text "KEY8" at -10.4,-36.35 h0.75 r90
  text "KEY6" at -8.15,-36.35 h0.75 r90
  text "KEY18" at -5.9,-36.35 h0.75 r90
  text "KEY17" at -3.65,-36.35 h0.75 r90
  text "KEY14" at -1.4,-36.35 h0.75 r90
  text "KEY16" at 0.85,-36.35 h0.75 r90
  text "KEY12" at 3.1,-36.35 h0.75 r90
  text "KEY11" at 5.35,-36.35 h0.75 r90
  text "KEY2" at -14.9,-52.35 h0.75 r90
  text "KEY5" at -12.65,-52.35 h0.75 r90
  text "KEY0" at -10.4,-52.35 h0.75 r90
  text "KEY1" at -8.15,-52.35 h0.75 r90
  text "KEY4" at -5.9,-52.35 h0.75 r90
  text "KEY3" at -3.65,-52.35 h0.75 r90
  text "KEY13" at -1.4,-52.35 h0.75 r90
  text "KEY10" at 0.85,-52.35 h0.75 r90
  text "KEY15" at 3.1,-52.35 h0.75 r90
Mechanical 11:
  drawing of 1628 lines, arcs and shapes, not listed

## Dimensions
-30.5,79.919 to -30,79.419 on Dimensions
-28.5,79.419 to -28,79.919 on Dimensions
-28.5,78.419 to -30,78.419 on Dimensions
-28,79.919 to -30.5,79.919 on Dimensions

## Text inside footprints (layer, text, board x,y; h text height)
P14: Mechanical 2 "4.1x5.1mm / min cutout" at -18.35,-33.1 h0.4 r90
P21: Mechanical 2 "4.1x5.1mm / min cutout" at -18.35,29.6 h0.4 r90
P25: Mechanical 2 "4.1x5.1mm / min cutout" at -8.35,-14.1 h0.4 r90
P30: Mechanical 2 "4.1x5.1mm / min cutout" at -8.35,10.6 h0.4 r90
P36: Mechanical 2 "4.1x5.1mm / min cutout" at 21.652,-13.75 h0.4 r90
P37: Mechanical 2 "4.1x5.1mm / min cutout" at 21.652,10.25 h0.4 r90
PESC: Mechanical 2 "4.1x5.1mm / min cutout" at -17.347,49.6 h0.4 r90
PFUNC: Mechanical 2 "4.1x5.1mm / min cutout" at -15.098,-51.85 h0.4 r180